# Altium PCB STM32_project_PCB.PcbDoc
Units mm, origin at the board's own origin, x right, y up, seen from the top; angles counter-clockwise.
Board outline 32.3 x 28.6 mm, 4 copper layers (L1_SIGNAL, L2_GND, L3_GND, Bottom Layer), stack 1.57 mm thick; 35 components, 27 nets, 166 pads, 101 vias.
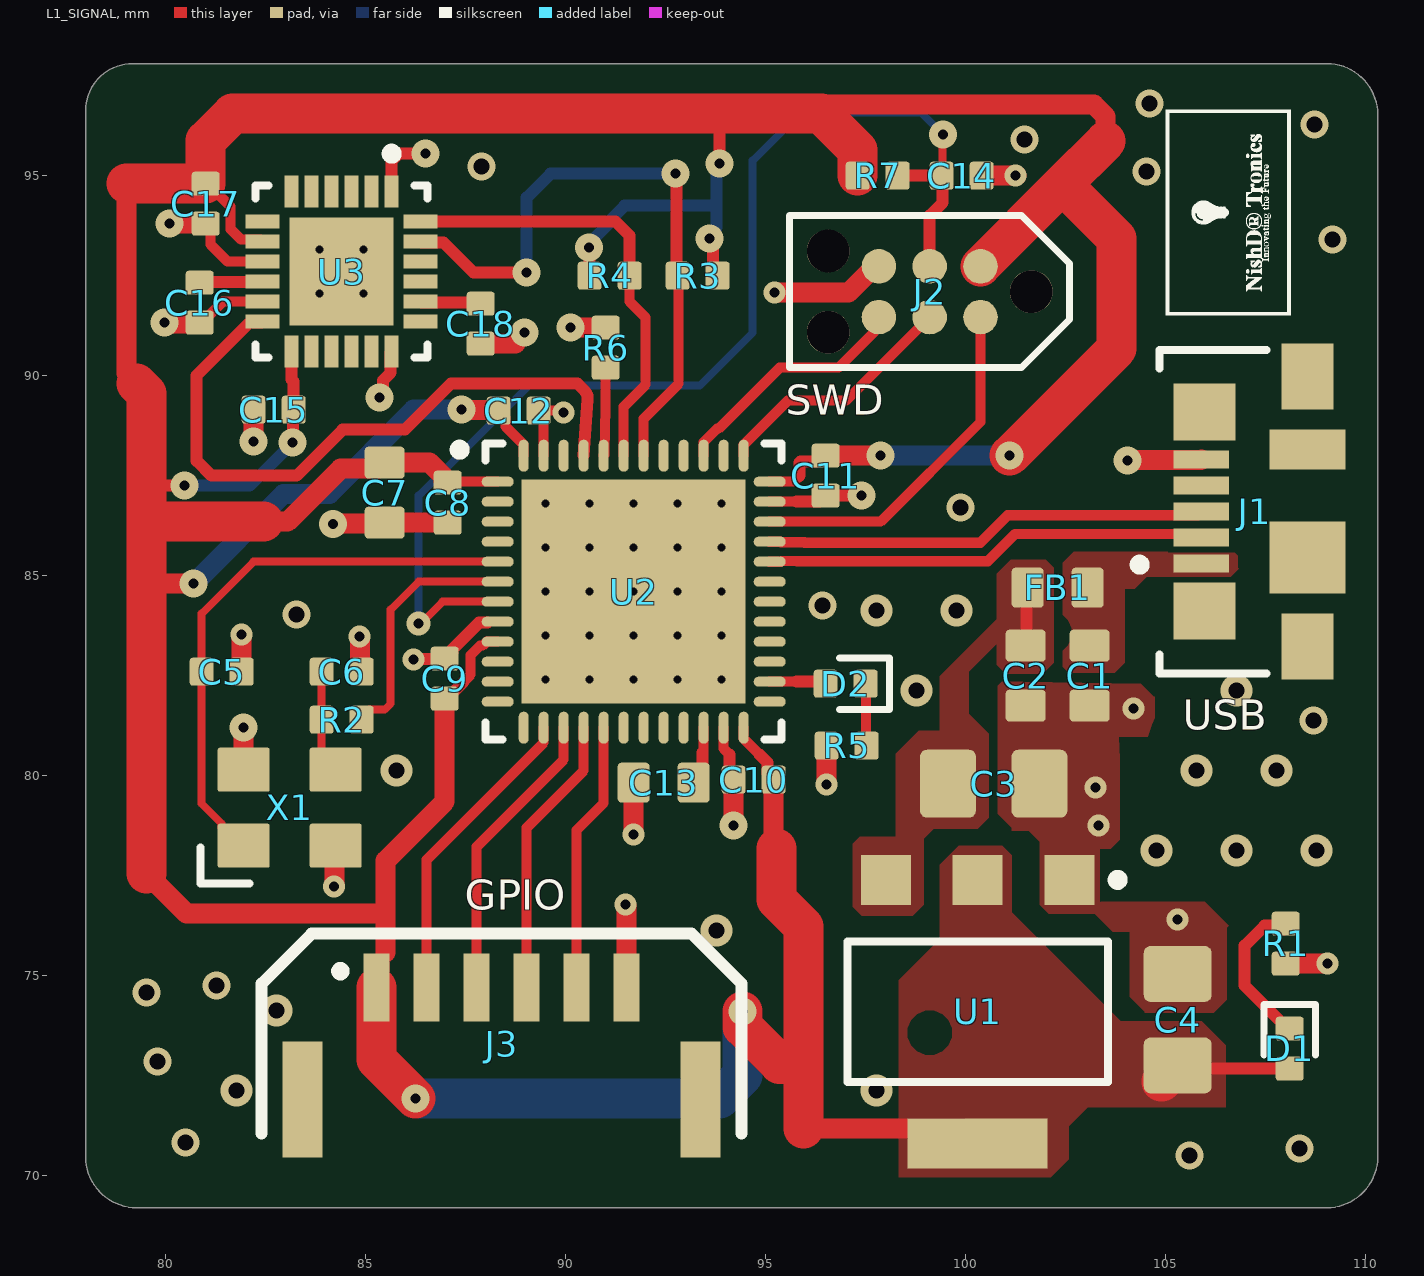
[diagram p0: L1_SIGNAL view]
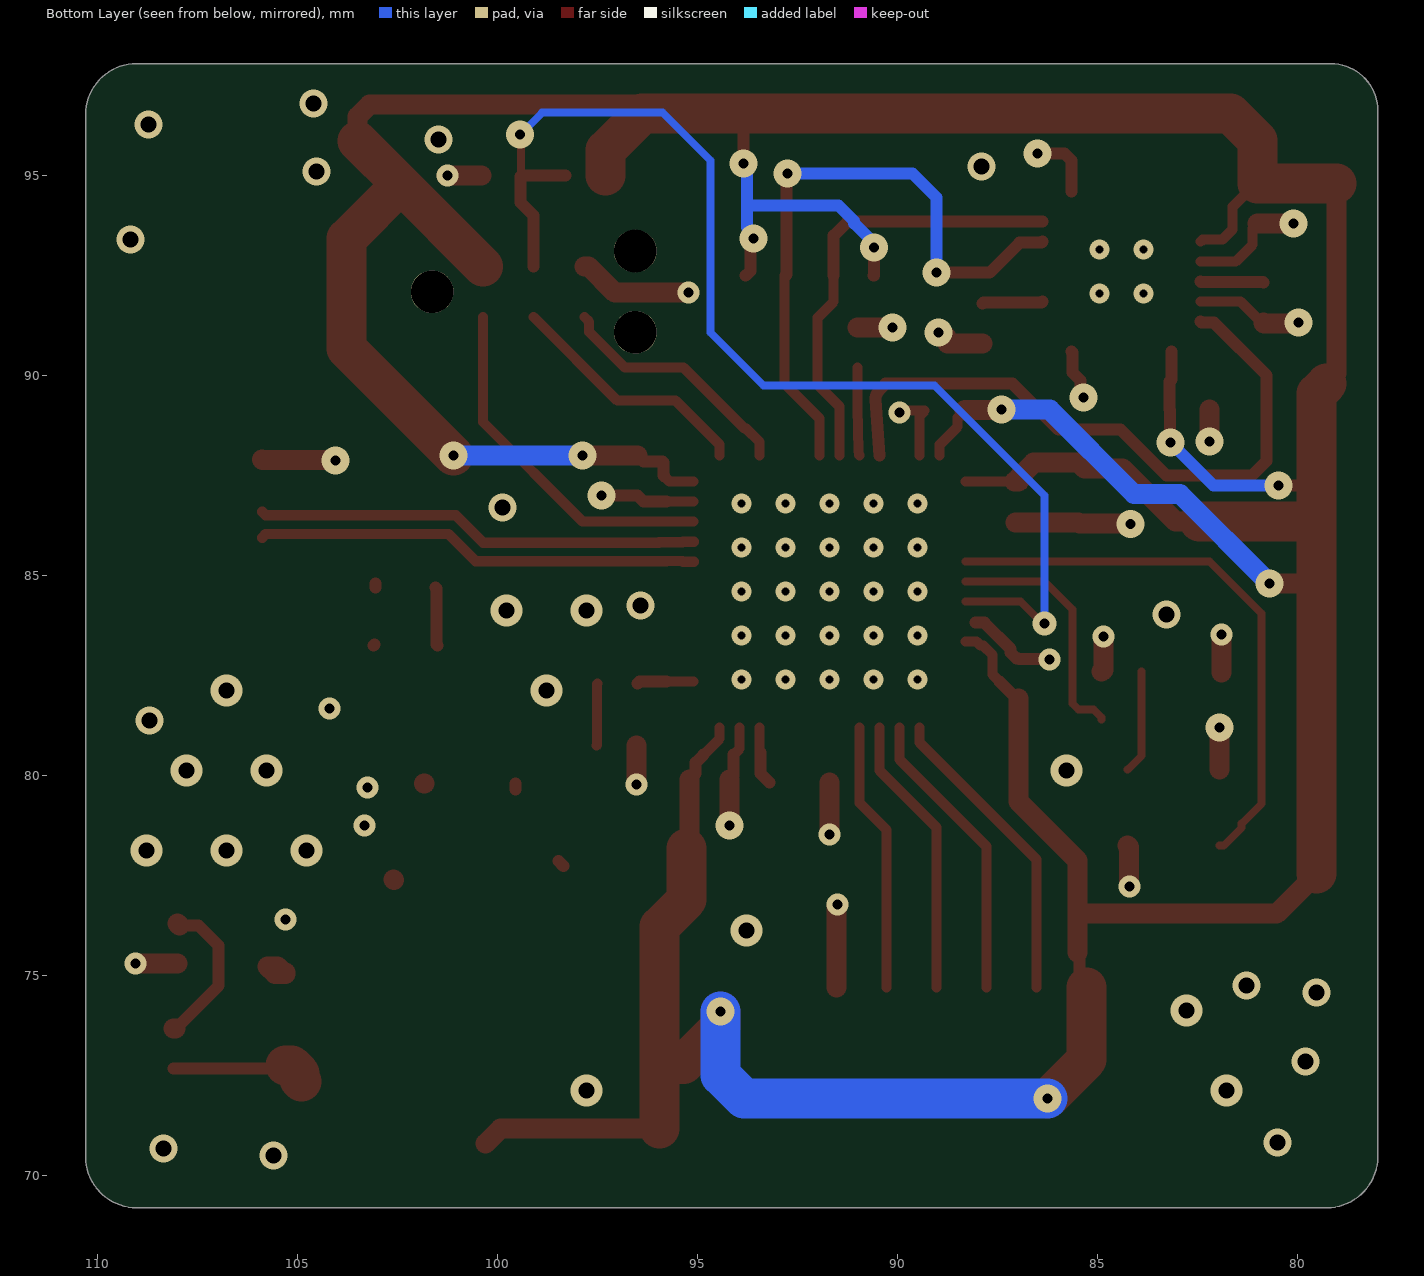
[diagram p1: Bottom Layer view, seen from below]
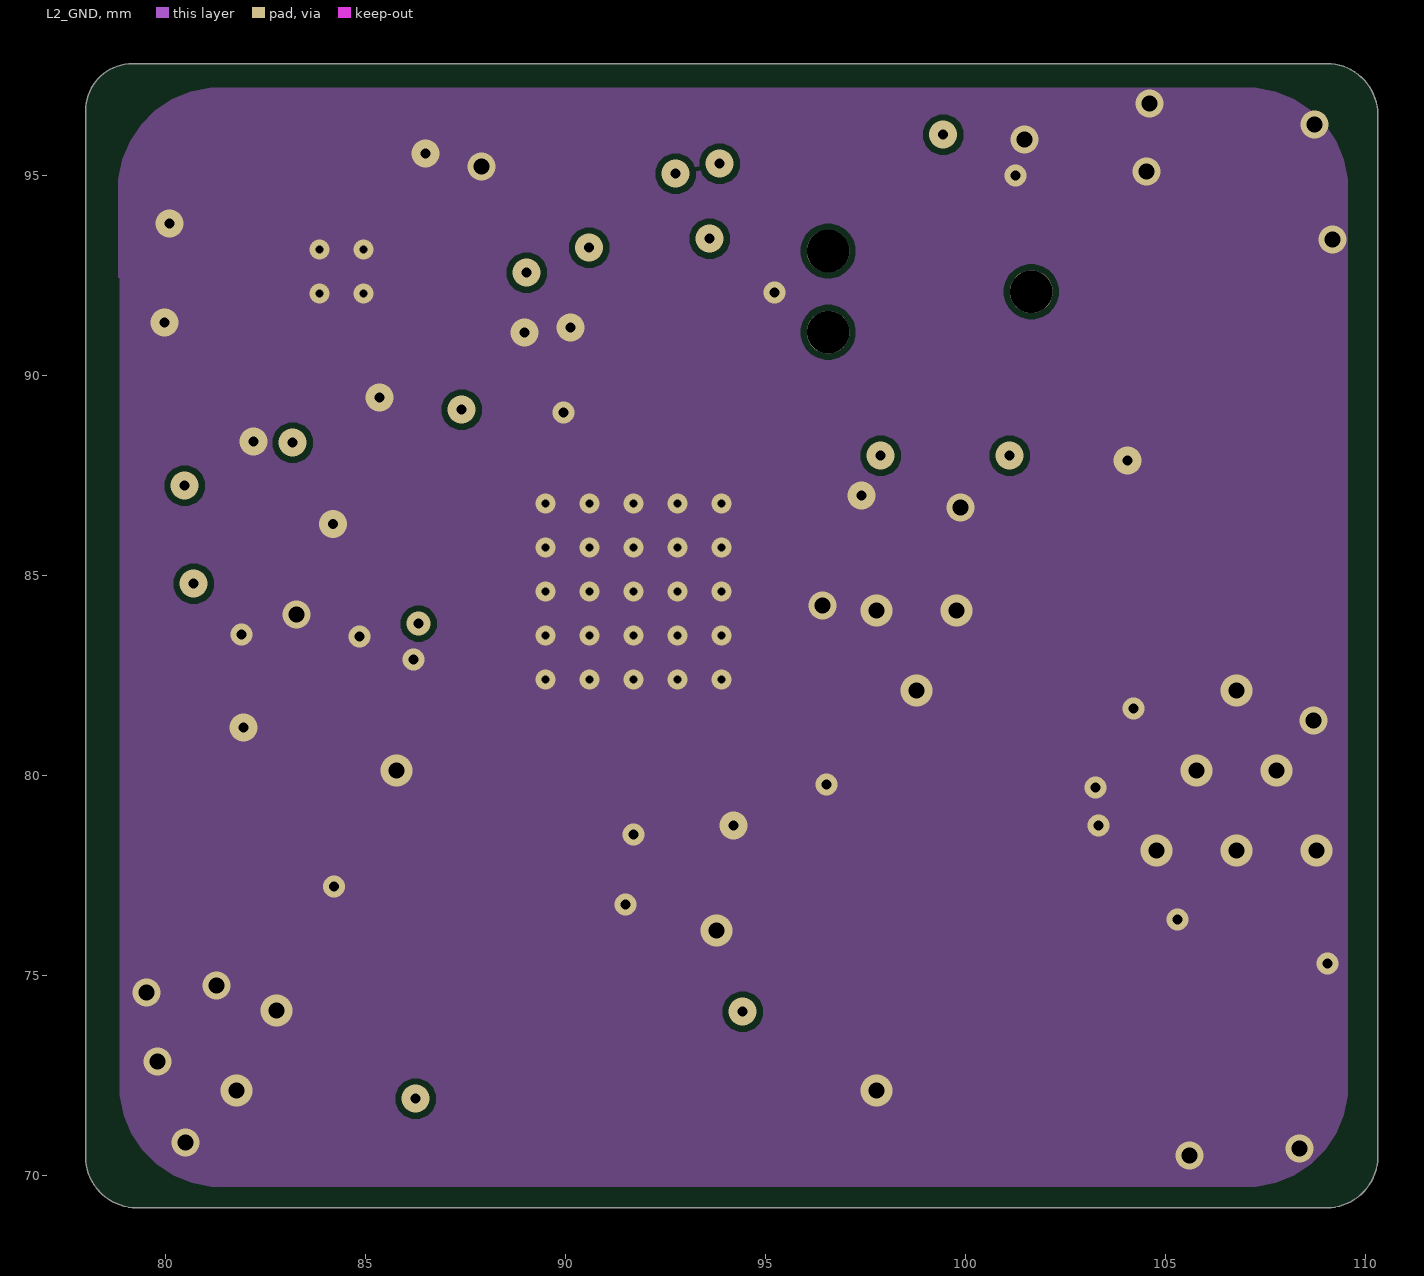
[diagram p2: L2_GND]
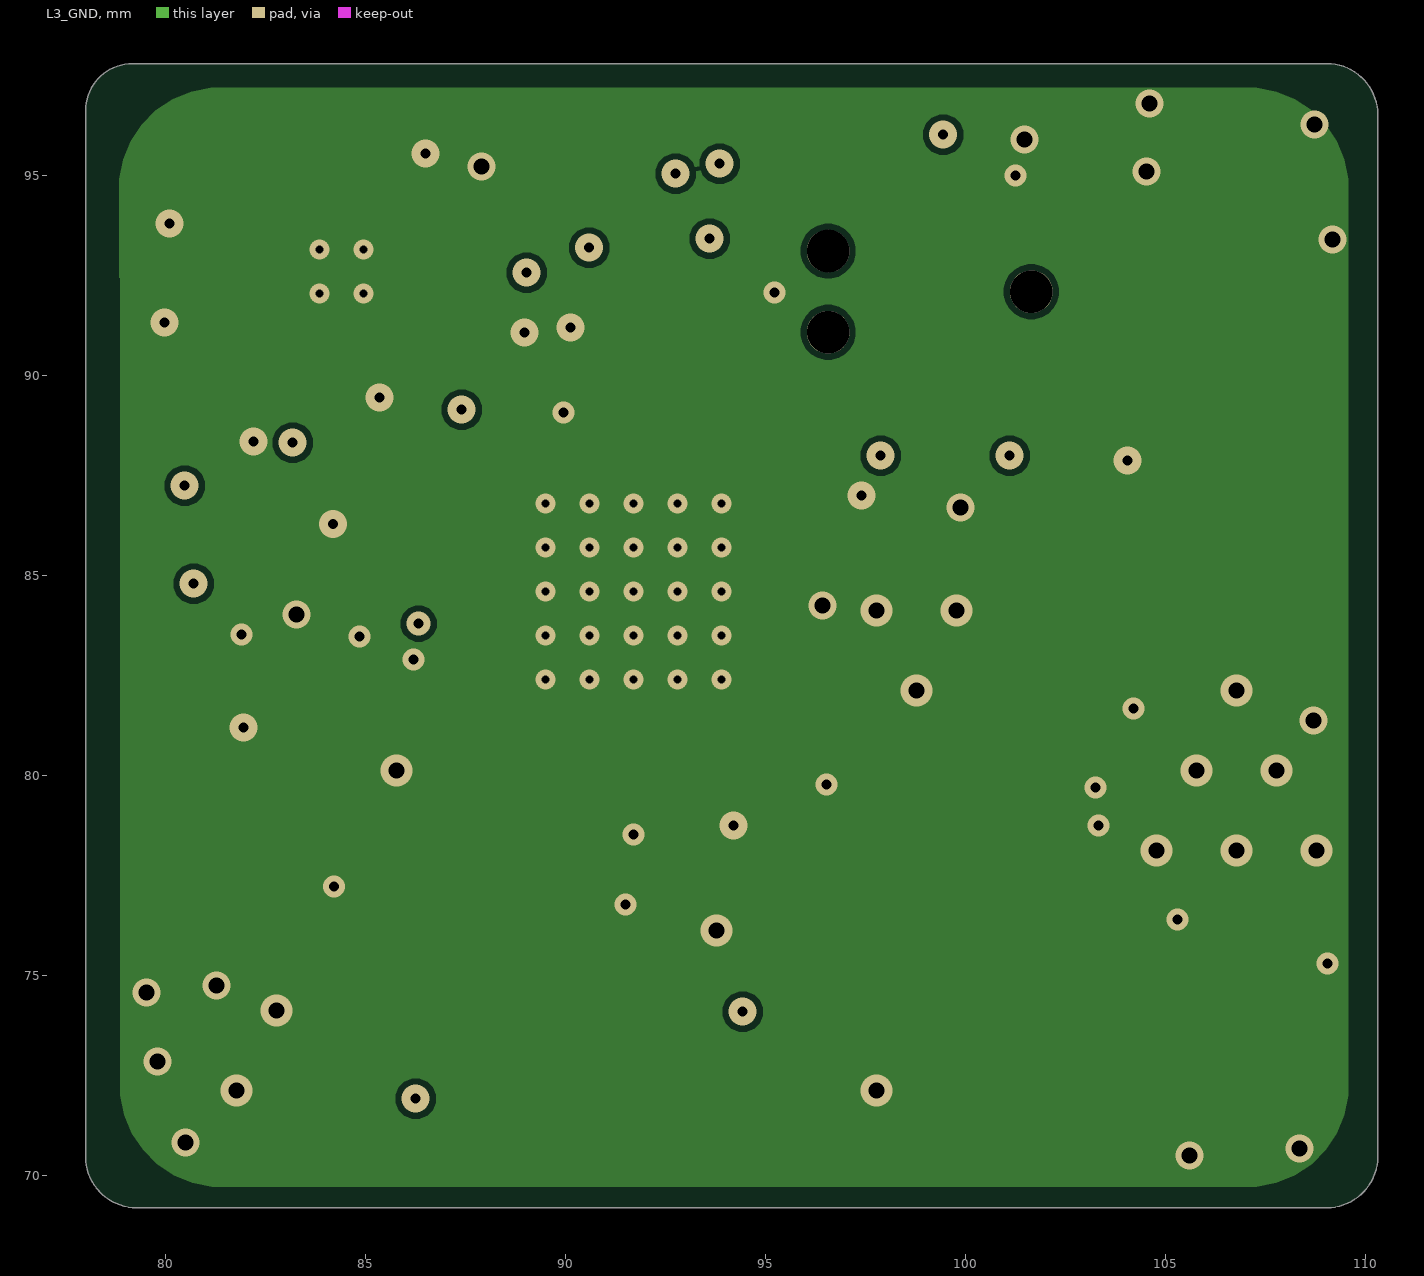
[diagram p3: L3_GND]
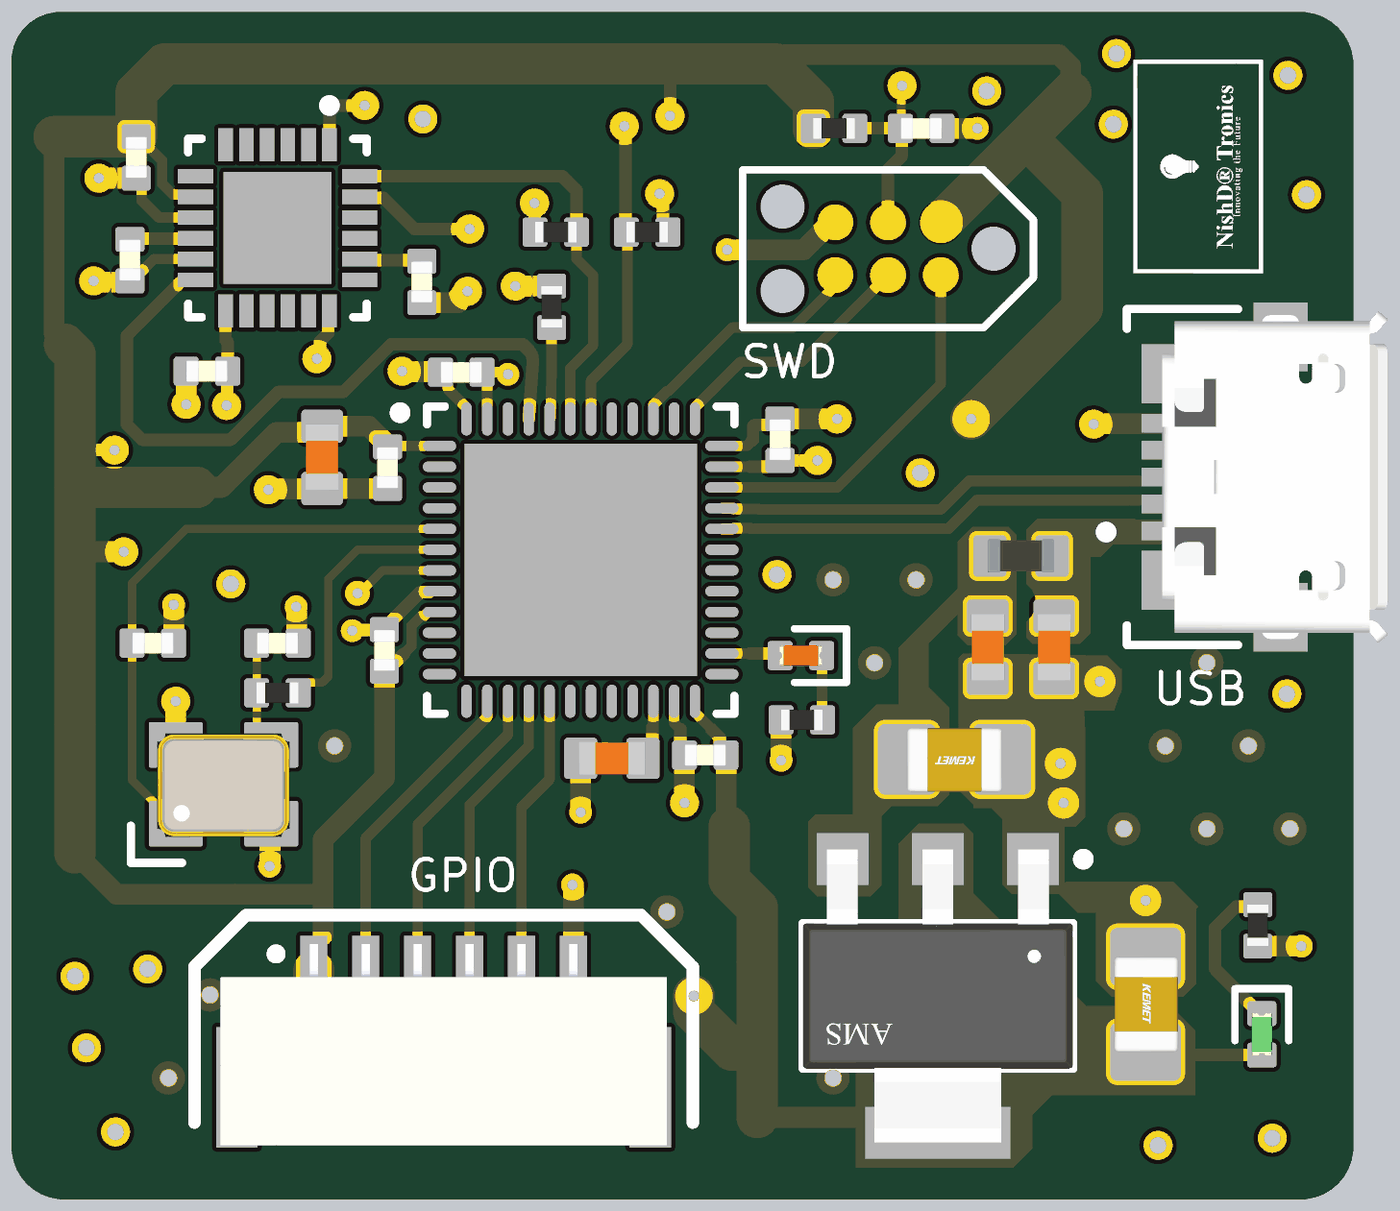
[diagram p4: 3D render of the assembled board from above, using the file's embedded part models]

## Layer stack, top to bottom
Top Solder: solder mask 0.0254, SM-001, Dk 4
L1_SIGNAL: signal copper 0.035
Dielectric 1: prepreg 0.2, PP-017, Dk 4.6
L2_GND: signal copper 0.0175
Dielectric 3: core 1.065, Core-039, Dk 4.6
L3_GND: signal copper 0.0175
Dielectric 5: prepreg 0.2, PP-017, Dk 4.6
Bottom Layer: signal copper 0.035
Bottom Solder: solder mask 0.0254, SM-001, Dk 4

## Board outline
78,70.47 78,96.63 cw(c79.17,96.63) 79.17,97.8 109.03,97.8 cw(c109.03,96.53) 110.3,96.53 110.3,70.47 cw(c109.03,70.47) 109.03,69.2 79.27,69.2 cw(c79.27,70.47)

## Design rules (kind name [scope] priority, off if disabled: settings)
Clearance [All] p1: gap=0.15 ignorepadtopadclearanceinfootprint=FALSE
DiffPairsRouting [All] p1: maxlimit=0.254 minlimit=0.203 mostfreqgap=0.254 toplayer_maxgap=0.203 toplayer_prefgap=0.203 toplayer_minwidth=0.26 toplayer_maxwidth=0.26 toplayer_prefwidth=0.26 bottomlayer_maxgap=0.203 bottomlayer_prefgap=0.203 bottomlayer_minwidth=0.26 bottomlayer_maxwidth=0.26 bottomlayer_prefwidth=0.26 impedanceprofiledriven=TRUE impedanceprofileid={775765ED-6F73-4EA2-BF4E-DD588CDE4D62} impedanceprofilevalue=90.000000 maxuncoupledlength=12.7
PolygonConnect [All] p1: connectstyle=Direct reliefconductorwidth=0.254 reliefentries=4 polygonreliefangle="90 Angle" airgapwidth=0.254
RoutingVias [All] p1: holewidth=0.3 width=0.7 viastyle="Through Hole" minholewidth=0.25 minwidth=0.55 maxholewidth=0.4 maxwidth=0.9
SolderMaskExpansion [All] p1: expansion=0.102 istentingtop=FALSE
UnRoutedNet [All] p1: checkbadconnections=TRUE
Width [All] p1: maxlimit=1 minlimit=0.2 preferedwidth=0.3 midlayer1_minwidth=0.254 midlayer1_maxwidth=0.254 midlayer1_prefwidth=0.254 midlayer2_minwidth=0.254 midlayer2_maxwidth=0.254 midlayer2_prefwidth=0.254 minimp=50.000000 maximp=50.000000 favimp=50.000000
28 further rules are at their usual default settings.

## Classes and differential pairs
differential pair class DIFF_USB: USB_D
differential pair USB_D: +USB_D_P -USB_D_N

## Components (designator, comment, footprint, x,y, rotation, side; value= is the part's Value field where it differs from the comment)
C1 "2u2" CAP_0603 103.1,82.5 r90 top
C2 "2u2" CAP_0603 101.5,82.5 r90 top
C3 "22u" CAP_0805 100.7,79.8 r180 top
C4 "22u" CAP_0805 105.3,73.9 r270 top
C5 "10P" CAP_0402 81.4,82.6 r0 top
C6 "10P" CAP_0402 84.4,82.6 r0 top
C7 "2u2" CAP_0603 85.475,87.075 r90 top
C8 "100n" CAP_0402 87.05,86.825 r90 top
C9 "100n" CAP_0402 86.975,82.425 r270 top
C10 "100n" CAP_0402 94.7,79.9 r0 top
C11 "100n" CAP_0402 96.5,87.5 r90 top
C12 "100n" CAP_0402 88.825,89.125 r180 top
C13 "2u2" CAP_0603 92.45,79.825 r0 top
C14 "100n" CAP_0402 99.9,95 r180 top
C15 "100n" CAP_0402 82.7,89.15 r0 top
C16 "100n" CAP_0402 80.85,91.825 r90 top
C17 "10n" CAP_0402 81,94.3 r90 top
C18 "2n2" CAP_0402 87.875,91.3 r90 top
D1 "GREEN" LED_0402_GREEN 108.1,73.175 r90 top
D2 "RED" LED_0402_RED 97,82.3 r0 top
FB1 "120R" FB_0603 102.3,84.7 r180 top
J1 "473460001" FP-473460001-MFG 108.2,86.6 r90 top
J2 "TC2030-NL" TC2030-NL-FP 99.1,92.1 r180 top
J3 "SM06B-GHS-TB" SM06B-GHS-TB 88.4,73.3 r0 top
R1 "1k" RES_0402 108,75.8 r270 top
R2 "0R" RES_0402 84.4,81.4 r0 top
R3 "2k2" RES_0402 93.3,92.5 r0 top
R4 "2k2" RES_0402 91.1,92.5 r180 top
R5 "1k" RES_0402 97.025,80.75 r180 top
R6 "10k" RES_0402 91,90.7 r270 top
R7 "10k" RES_0402 97.8,95 r180 top
U1 "AMS1117-3.3" FP-AMS1117-IPC_C 100.3,74.1 r270 top
U2 "STM32F411CEU6" STM-UFQFPN48_L 91.7,84.6 r0 top
U3 "MPU-6050" IS-QFN-24_V 84.4,92.6 r270 top
X1 "24MHz" XTAL_3225 83.1,79.2 r0 top

## Footprints (in the part's own frame and the unit in brackets; to place one, negate y for a bottom-side part, rotate by r counter-clockwise, add the part's x,y. Pads: shape width x height; smd on the part's side, far side on the other; paste and mask are expansions set on the pad)
CAP_0402 [mm]
  rrect25% 0.6x0.7 smd: 1(-0.5,0) 2(0.5,0)
  body extent -0.5,-0.26 0.5,0.26, height 0.37
CAP_0603 [mm]
  rrect25% 0.8x1 smd: 1(-0.75,0) 2(0.75,0)
  body extent -0.8,-0.4 0.8,0.4, height 0.51
CAP_0805 [mm]
  rrect25% 1.4x1.7 smd: 1(-1.143,0) 2(1.143,0)
  body extent -1.15,-0.76 1.15,0.79, height 1.01
FB_0603 [mm]
  rrect25% 0.8x1 smd: 1(-0.75,0) 2(0.75,0)
  body extent -0.8,-0.4 0.8,0.4, height 0.81
FP-473460001-MFG [mm]
  rect 0.45x1.38 smd paste+0 mask+0: 1(-1.3,2.31) 2(-0.65,2.31) 3(0,2.31) 4(0.65,2.31) 5(1.3,2.31)
  rect 1.425x1.55 smd paste+0 mask+0: 6(-2.488,2.225) 7(2.488,2.225)
  rect 1.65x1.3 smd paste+0 mask+0: 8(-3.375,-0.35) 11(3.375,-0.35)
  rect 1.8x1.9 smd paste+0 mask+0: 9(-1.15,-0.35)
  rect 1x1.9 smd paste+0 mask+0: 10(1.55,-0.35)
  silkscreen extent -4.05,0.67 4.05,3.97, body extent -4.3,-2.48 4.3,3.45, height 0.25
FP-AMS1117-IPC_C [mm]
  rect 1.25x1.25 smd paste+0 mask+0: 1(-3.295,2.29) 2(-3.295,0) 3(-3.295,-2.29)
  rect 1.25x3.5 smd paste+0 mask+0: 4(3.295,0)
  silkscreen extent -3.42,-3.25 1.75,3.63, body extent -3.9,-3.35 3.9,3.35, height 0.25
IS-QFN-24_V [mm] "QFN, 24-Leads, Body 4x4mm, Pitch 0.5mm, Thermal Pad 2.7x2.6mm"
  rect 0.8x0.35 smd: 1(-2,1.25) 2(-2,0.75) 3(-2,0.25) 4(-2,-0.25) 5(-2,-0.75) 6(-2,-1.25) 13(2,-1.25) 14(2,-0.75) 15(2,-0.25) 16(2,0.25) 17(2,0.75) 18(2,1.25)
  rect 0.35x0.85 smd mask+0.102: 7(-1.25,-1.975) 8(-0.75,-1.975) 9(-0.25,-1.975) 10(0.25,-1.975) 11(0.75,-1.975) 12(1.25,-1.975) 19(1.25,1.975) 20(0.75,1.975) 21(0.25,1.975) 22(-0.25,1.975) 23(-0.75,1.975) 24(-1.25,1.975)
  rect 2.7x2.6 smd: 25(0,0)
  silkscreen extent -3.07,-2.15 2.15,2.15, body extent -2,-2 2,2, height 0.95
LED_0402_GREEN [mm]
  rrect25% 0.6x0.7 smd: A(-0.5,0) K(0.5,0)
  silkscreen extent -0.15,-0.65 1.1,0.65, body extent -0.51,-0.25 0.51,0.25, height 0.45
LED_0402_RED [mm]
  rrect25% 0.6x0.7 smd: A(-0.5,0) K(0.5,0)
  silkscreen extent -0.15,-0.65 1.1,0.65, body extent -0.51,-0.25 0.51,0.25, height 0.45
RES_0402 [mm]
  rrect25% 0.6x0.7 smd: 1(-0.5,0) 2(0.5,0)
  body extent -0.5,-0.25 0.5,0.25, height 0.3
SM06B-GHS-TB [mm]
  rect 0.65x1.7 smd: 1(-3.125,1.4) 2(-1.875,1.4) 3(-0.625,1.4) 4(0.625,1.4) 5(1.875,1.4) 6(3.125,1.4)
  rect 1x2.9 smd: ""(-4.975,-1.4) ""(4.975,-1.4)
  silkscreen extent -6,-2.25 6,2.75, body extent -5.38,-2.8 5.38,2.05, height 4.26
STM-UFQFPN48_L [mm] "QFN, 48-Leads, Body 7.1x7.1mm, Pitch 0.5mm, Thermal Pad 5.6x5.6mm, IPC High Density"
  oval 0.8x0.25 smd: 1(-3.4,2.75) 2(-3.4,2.25) 3(-3.4,1.75) 4(-3.4,1.25) 5(-3.4,0.75) 6(-3.4,0.25) 7(-3.4,-0.25) 8(-3.4,-0.75) 9(-3.4,-1.25) 10(-3.4,-1.75) 11(-3.4,-2.25) 12(-3.4,-2.75) 25(3.4,-2.75) 26(3.4,-2.25) 27(3.4,-1.75) 28(3.4,-1.25) 29(3.4,-0.75) 30(3.4,-0.25) 31(3.4,0.25) 32(3.4,0.75) 33(3.4,1.25) 34(3.4,1.75) 35(3.4,2.25) 36(3.4,2.75)
  oval 0.25x0.8 smd: 13(-2.75,-3.4) 14(-2.25,-3.4) 15(-1.75,-3.4) 16(-1.25,-3.4) 17(-0.75,-3.4) 18(-0.25,-3.4) 19(0.25,-3.4) 20(0.75,-3.4) 21(1.25,-3.4) 22(1.75,-3.4) 23(2.25,-3.4) 24(2.75,-3.4) 37(2.75,3.4) 38(2.25,3.4) 39(1.75,3.4) 40(1.25,3.4) 41(0.75,3.4) 42(0.25,3.4) 43(-0.25,3.4) 44(-0.75,3.4) 45(-1.25,3.4) 46(-1.75,3.4) 47(-2.25,3.4) 48(-2.75,3.4)
  rect 5.6x5.6 smd: 49(0,0)
  silkscreen extent -4.47,-3.7 3.7,3.7, body extent -3.55,-3.55 3.55,3.55, height 0.6
TC2030-NL-FP [mil]
  round 33.98 smd paste-16.99: 1(-50,-25) 2(-50,25) 3(0,-25) 4(0,25) 5(50,-25) 6(50,25)
  round 42.01 hole 42.01 unplated: MH(-100,0) MH(100,-40) MH(100,40)
  silkscreen extent -138,-75 138,75
XTAL_3225 [mm]
  rrect10% 1.3x1.1 smd: 1(-1.15,-0.95) 2(1.15,-0.95) 3(1.15,0.95) 4(-1.15,0.95)
  silkscreen extent -2.23,-1.89 -1,-1, body extent -1.6,-1.28 1.6,1.22, height 0.61

## Part data
C1 C2 C7 C13: library part CAP_0603, "Capacitor SMD 0603"
C3 C4: library part CAP_0805, "Capacitor SMD 0805"
C5 C6 C8 C9 C10 C11 C12 C14 C15 C16 C17 C18: library part CAP_0402, "Capacitor SMD 0402"
D1: library part LED_0402_GREEN, "LED 0402 GREEN SMD"
D2: library part LED_0402_RED, "LED 0402 RED SMD"
FB1: library part FB_0603, "Ferrite Bead SMD 0603"
J1: library part CMP-2000-05246-2, "CONN RCPT USB2.0 MICRO B SMD R/A", Current Rating=1.8A, Manufacturer=Molex, Package=0, Temperature="-30°C to +85°C", Temperature Range High=+85°C, Temperature Range Low=-30°C, Voltage Rating=30V, Automotive=No, Category=Conn, ComponentLink2Description=Datasheet, ComponentLink2URL=https://www.molex.com/webdocs/datasheets/pdf/en-us/0473460001_IO_CONNECTORS.pdf, Conn Orientation="Right Angle", Contact Material=Gold,Nickel, Device Class L1=Connectors, Device Class L2="USB Connectors", Device Class L3=unset, Digikey Description="CONN RCPT USB2.0 MICRO B SMD R/A", Footprint Url=https://www.molex.com/pdm_docs/sd/473460001_sd.pdf, Height=2.945mm, Is Female=yes, Lead Free=Yes, Manufacturer Part Number=473460001, Number Of Contacts=5, Octopart=https://octopart.com/47346-0001-molex-7164928, Pitch=0.65mm, RoHS=TRUE, Shielding=true, Usb Standard="USB 2.0"
J2: "Tag-Connect No-Solder SWD Debug Connector (No Legs) DO NOT PLACE", Manufacturer=Tag-Connect, Manufacturer Part Number=TC2030-NL-FP
J3: "Header Connector 6 Position 1.25MM Pitch SMD Horizontal JST GH", Manufacturer=JST, Manufacturer Part Number=SM06B-GHS-TB
R1 R2 R3 R4 R5 R6 R7: library part RES_0402, "Resistor SMD 0402"
U1: library part CMP-209535-000001-1, "LDO Voltage Regulators 1A, 3.3V", Dropout Voltage=1.1V, Manufacturer="Advanced Monolithic Systems", Max Junction Temp=+125°C, Max Power Dissipation=1.2W, Max Supply Voltage=15V, Nominal Supply Current=5mA, Output Current=1A, Output Voltage=3.3V, Package=AMS1117, Temperature="-40°C to +125°C", Temperature Range Low=-40°C, Automotive=No, Category=IC, ComponentLink2Description=Datasheet, ComponentLink2URL=http://www.advanced-monolithic.com/pdf/ds1117.pdf, Device Class L1="Integrated Circuits (ICs)", Device Class L2="Power Management ICs", Device Class L3="Voltage Regulators - Linear", Height=1.8mm, Ipc Land Pattern Name=SOT229P700X180-4, Lead Free=Yes, Manufacturer Part Number=AMS1117-3.3, Number Of Outputs=1, Octopart=https://octopart.com/ams1117-3.3-advanced+monolithic+systems-25899300, Output Type=Fixed, RoHS=TRUE, Standoff Height=0.64mm, Temperature Range High=+125°C
U2: library part CMP-0243-00165-1, "ARM Cortex-M4 32-bit MCU+FPU, 512 KB Flash, 128 KB RAM, 36 I/Os, 48-Pin UFQFPN, -40 to 85 degC, Tray", I/Os (High Current)=36, Operating Frequency(F) (Processor speed) (MHz)=100, Package Description=UFQFPN48, Package Reference="48-Pin Ultra Thin Fine Pitch Quad Flat No-Lead, 7 x 7 x 0.6 mm Body, 0.5 mm Pitch, Exposed Pad", Supply Voltage(Vcc) min (V)=1.7, ComponentLink1Description="Manufacturer URL", ComponentLink1URL=http://www.st.com/, ComponentLink2Description=Datasheet, ComponentLink2URL=http://www.st.com/st-web-ui/static/active/en/resource/technical/document/datasheet/DM00115249.pdf, Core="ARM Cortex-M4", DatasheetVersion="Rev. 6", FLASH Size (Prog) (kB)=512, Internal RAM Size (kB)=128, Mounting Technology="Surface Mount", Packing=Tray
U3: library part CMP-1753-00002-2, "3-Axis Gyroscope, Accelerometer and a Digital Motion Processor(TM) (DMP), 2.375 to 3.46 V, -40 to 85 degC, 24-Pin QFN, RoHS, Tape and Reel", Manufacturer=InvenSense, Standard Package=5,000, Category=Sensors,Transducers, Datasheet URL=http://datasheet.octopart.com/MPU-6050-InvenSense-datasheet-14421344.pdf, Datasheet Version="Rev. 3.3, 05/2012", Dynamic Catalog=MPU-6000™Series, Family=Multifunction, Featured Product=MPU-60506-Axis,IntegratedI²CSolution, Manufacturer URL=http://www.invensense.com/, Online Catalog=MPU-6000™Series, Other Names="1428-1007-2 / MPU6050", Output Type=Digital, Sensor Type=MotionTracking, Unit PriceUSD=Digital
X1: library part TSX-3225_24.0000MF15X-AC, "Crystal SMD 24MHz 10PPM 7pF 3225", Manufacturer=Epson, Manufacturer Part Number="TSX-3225 24.0000MF15X-AC"

## Via types
v1: diameter 0.5, hole 0.2, L1_SIGNAL to Bottom Layer, 29 vias
v2: diameter 0.7, hole 0.25, L1_SIGNAL to Bottom Layer, 26 vias
v3: diameter 0.7, hole 0.4, L1_SIGNAL to Bottom Layer, 16 vias
v4: diameter 0.55, hole 0.25, L1_SIGNAL to Bottom Layer, 15 vias
v5: diameter 0.8, hole 0.4, L1_SIGNAL to Bottom Layer, tented both sides, 14 vias
v6: diameter 0.6, hole 0.25, L1_SIGNAL to Bottom Layer, 1 vias

## Nets (pads, with @x,y where several pads share a name; then routed paths per layer and width w, separated by ;. In a path a pad name is that pad's centre, name@x,y a point inside that pad or via, vN(x,y) a via of type N, cw(c..) or ccw(c..) an arc to the next point about the centre after c; other vN are vias at no path point)
+3V3: C4.2 C7.2 C8.2 C9.2 C10.2 C11.2 C12.2 C15.2 C17.2 D1.A J2.1 J3.1 R3.2 R4.2 R7.2 U1.2 U1.4 U2.1 U2.9 U2.24 U2.36 U2.48 U3.8 U3.13 | length 155.2
  L1_SIGNAL w0.25: C17.2 81.05,94.8 81.625,94.225 81.625,93.661 81.886,93.4 82.375,93.4 U3.8 ; C8.2@87.075,87.35 U2.1 ; 87.45,82.35 87.625,82.525 87.625,83.016 87.859,83.25 87.925,83.25 88.025,83.35 U2.9 ; C12.2 88.5,88.95 88.5,88.725 88.95,88.275 U2.48 ; U2.24 94.45,80.925 94.85,80.525 ; U2.36 95.7,87.35 95.825,87.475
  L1_SIGNAL w0.3: 79.525,87.35 79.625,87.25 v2(80.475,87.25) ; U3.13 83.15,89.9 83.2,89.85 C15.2 83.188,89.138 83.188,88.338 v2(83.175,88.325) ; J3.1 85.45,74.875 85.45,75.526 85.5,75.576 ; C9.2@87.025,81.925 87.45,82.35 ; v2(90.587,93.2) 90.594,93.194 90.594,92.506 R4.2 ; v2(93.6,93.425) 93.677,93.348 93.677,92.623 R3.2 ; v2(93.85,95.3) 93.85,96.55 ; 94.85,80.525 95.05,80.325 95.05,80.05 C10.2 ; 95.825,87.475 95.85,87.5 95.85,87.824 95.876,87.85 96.35,87.85 C11.2 ; C4.2 105.382,72.675 D1.A
  L1_SIGNAL w0.5: 79.025,94.8 79.025,90.05 79.275,89.8 ; 79.525,77.55 80.525,76.55 85.5,76.55 ; 79.525,84.875 79.6,84.8 v2(80.7,84.8) ; 82.45,86.35 83.05,86.35 84.375,87.675 85.325,87.675 C7.2 86.6,87.825 86.95,87.475 86.95,87.375 86.975,87.35 C8.2@87.075,87.35 ; 85.5,75.576 85.5,76.55 ; C9.2 86.975,79.35 85.5,77.875 85.5,76.55 ; v2(87.4,89.15) 87.412,89.138 88.312,89.138 C12.2 ; C10.2 95.2,78.25 95.275,78.175 ; 95.95,71.175 99.93,71.175 U1.4 ; 96.389,96.55 96.614,96.775 103.207,96.775 103.5,96.482 103.5,95.865 ; C11.2 97.825,88 v2(97.875,88)
  L1_SIGNAL w1: 79.025,94.8 C17.2 81,95.875 81.675,96.55 93.85,96.55 96.389,96.55 97.3,95.639 R7.2 ; 79.275,89.8 79.525,89.55 79.525,87.35 79.525,86.45 ; 79.525,77.55 79.525,84.875 79.525,86.45 ; 82.45,86.35 79.625,86.35 79.525,86.45 ; J3.1 85.275,72.9 v2(86.25,71.925) ; v2(94.425,74.1) 94.425,73.719 95.35,72.794 95.95,72.794 ; 95.275,78.175 95.275,76.9 95.95,76.225 95.95,72.794 ; 95.95,71.175 95.95,72.794 ; J2.1 102.417,94.783 ; v2(101.1,88) 103.775,90.675 103.775,93.425 102.417,94.783 ; 103.5,95.865 102.417,94.783 ; C4.2@104.9,72.357 104.95,72.407 104.95,72.557 105.15,72.757 C4.2
  Bottom Layer w0.3: v2(80.475,87.25) 82.1,87.25 v2(83.175,88.325) ; v2(90.587,93.2) 90.587,93.308 91.088,93.809 91.088,93.863 91.475,94.25 93.712,94.25 93.773,94.311 ; v2(93.6,93.425) 93.6,93.533 93.773,93.707 93.773,94.311 ; v2(93.85,95.3) 93.773,95.223 93.773,94.311
  Bottom Layer w0.5: v2(80.7,84.8) 82.945,87.045 84.093,87.045 86.198,89.15 v2(87.4,89.15) ; v2(97.875,88) v2(101.1,88)
  Bottom Layer w1: v2(86.25,71.925) 93.839,71.925 94.425,72.511 v2(94.425,74.1)
+5V: C2.2 C3.2 FB1.2 U1.3 | length 1.8
  L1_SIGNAL w0.3: U1.3@98.357,77.743 U1.3@98.485,77.87 ; C3.2@99.557,79.65 C3.2 ; C2.2 101.525,83.275 101.525,84.675 FB1.2
CRISTAL_IN: C6.1 R2.1 X1.3 | length 2.6
  L1_SIGNAL w0.2: C6.1 R2.1 83.9,80.5 X1.3
GND: C1.1 C2.1 C3.1 C4.1 C5.2 C6.2 C7.1 C8.1 C9.1 C10.1 C11.1 C12.1 C13.1 C14.1 C15.1 C16.1 C17.1 C18.1 J1.5 J2.5 J3.6 R1.2 R5.2 R6.1 U1.1 U2.8 U2.23 U2.35 U2.47 U2.49 U3.1 U3.9 U3.11 U3.18 U3.25 X1.2 X1.4 | length 39.8
  L1_SIGNAL w0.25: C16.1 80.9,91.325 81.425,91.85 U3.11 ; C17.1 81.125,93.675 81.125,93.275 81.55,92.85 U3.9 ; U2.47 89.45,89 C12.1 89.9,89.125 cw(c89.9,89.075) v4(89.95,89.075) ; J3.6 J3.6@91.613,74.788 ; C13.1@91.613,79.737 C13.1 ; U2.23 93.95,80.675 94.1,80.525 ; U2.35 95.775,86.85
  L1_SIGNAL w0.3: v2(85.35,89.45) 85.427,89.527 85.427,89.877 85.625,90.076 85.625,90.575 U3.18 ; U3.1 85.65,95.374 85.826,95.55 v2(86.5,95.55) ; v4(86.2,82.9) 86.212,82.912 86.963,82.912 C9.1 87.025,82.925 87.175,83.075 87.175,83.167 87.833,83.825 U2.8@88.05,83.825 ; 94.1,80.525 94.1,80 C10.1 ; 95.775,86.85 96.35,86.85 C11.1 v2(97.4,87)
  L1_SIGNAL w0.5: v2(79.975,91.325) ccw(c80,91.325) 80,91.3 80.825,91.3 ccw(c80.825,91.325) C16.1 ; v2(80.1,93.8) C17.1 ; C5.2 81.9,82.575 v4(81.9,83.525) ; X1.4 v2(81.95,81.2) ; v2(82.2,88.35) C15.1 ; v2(84.18,86.295) 84.195,86.31 85.46,86.31 C7.1 C8.1 ; v4(84.21,77.225) 84.219,77.235 84.219,78.219 X1.2 ; v4(84.85,83.475) 84.86,83.465 84.86,82.64 C6.2 ; C18.1 88.75,90.8 88.75,90.85 cw(c88.975,90.85) v2(88.975,91.075) ; v2(90.125,91.2) R6.1 ; v4(91.5,76.775) 91.525,76.75 J3.6 ; v4(91.7,78.525) C13.1 ; v2(94.2,78.75) C10.1 ; v4(95.225,92.075) 97.072,92.075 97.732,92.735 J2.5 ; v4(96.525,79.775) R5.2 ; C14.1 101.275,95 v4(101.25,95) ; C3.1@101.825,79.8 C3.1 ; U1.1 U1.1@102.6,77.405 ; v2(104.05,87.875) 104.062,87.888 105.877,87.888 J1.5 ; C4.1 105.568,75.043 105.75,75.225 105.5,75.225 105.325,75.05 C4.1@105.3,75.075 ; R1.2 108.025,75.3 v4(109.05,75.3)
  other v1: 89.5,82.4 90.6,82.4 91.7,82.4 92.8,82.4 93.9,82.4 89.5,83.5 90.6,83.5 91.7,83.5 92.8,83.5 93.9,83.5 89.5,84.6 90.6,84.6 91.7,84.6 92.8,84.6 93.9,84.6 89.5,85.7 90.6,85.7 91.7,85.7 92.8,85.7 93.9,85.7 89.5,86.8 90.6,86.8 91.7,86.8 92.8,86.8 93.9,86.8 83.85,92.05 84.95,92.05 83.85,93.15 84.95,93.15
  other v3: 105.6,70.5 108.35,70.675 80.5,70.825 79.8,72.85 79.525,74.575 81.275,74.75 108.7,81.375 83.275,84.025 96.425,84.25 99.875,86.7 109.175,93.4 104.525,95.1 87.9,95.225 101.475,95.9 108.725,96.275 104.6,96.8
  other v4: 105.3,76.4 103.325,78.75 103.25,79.7 104.2,81.675
  other v5: 81.775,72.125 97.775,72.125 82.775,74.125 93.775,76.125 104.775,78.125 106.775,78.125 108.775,78.125 85.775,80.125 105.775,80.125 107.775,80.125 98.775,82.125 106.775,82.125 97.775,84.125 99.775,84.125
IMU_CPOUT: C18.2 U3.20 | length 1.5
  L1_SIGNAL w0.3: U3.20 86.4,91.825 87.85,91.825 C18.2
IMU_INT: U2.45 U3.12 | length 16.9
  L1_SIGNAL w0.3: U3.12 82.4,91.325 82.092,91.325 80.775,90.008 80.775,87.869 81.144,87.5 83.275,87.5 84.425,88.65 85.981,88.65 87.131,89.8 90.3,89.8 90.463,89.637 cw(c90.251,89.425) 90.55,89.404 U2.45
IMU_REGOUT: C16.2 U3.10 | length 1.6
  L1_SIGNAL w0.3: C16.2 80.863,92.338 82.412,92.338 U3.10
IMU_SCL: R3.1 U2.42 U3.23 | length 16.3
  L1_SIGNAL w0.25: U2.42 91.95,88.925 92.825,89.8 92.825,92.475 R3.1
  L1_SIGNAL w0.3: U3.23 86.4,93.325 86.95,93.325 87.7,92.575 v2(89.025,92.575) ; v2(92.75,95.05) 92.775,95.025 92.775,92.525 R3.1
  Bottom Layer w0.3: v2(89.025,92.575) 89.025,94.45 89.625,95.05 v2(92.75,95.05)
IMU_SDL: R4.1 U2.43 U3.24 | length 11.3
  L1_SIGNAL w0.25: U2.43 91.45,89.225 92,89.775 92,91.45 91.6,91.85 R4.1
  L1_SIGNAL w0.3: U3.24 91.25,93.85 91.6,93.5 R4.1
LED_PWR_K: D1.K R1.1 | length 3.8
  L1_SIGNAL w0.3: R1.1@107.95,76.25 107.475,76.25 106.975,75.75 106.975,74.75 D1.K@108.05,73.675
  L1_SIGNAL w0.5: R1.1@107.95,76.25 R1.1 ; D1.K@108.05,73.675 D1.K
MCU_BOOT0: R6.2 U2.44 | length 2.2
  L1_SIGNAL w0.25: U2.44 90.95,88.021 90.972,88.021 90.974,88.102 91,89.203 R6.2
MCU_LED_A: D2.A U2.26 | length 1.4
  L1_SIGNAL w0.25: U2.26 95.775,82.35
  L1_SIGNAL w0.3: 95.775,82.35 96.45,82.35 D2.A
MCU_LED_K: D2.K R5.1 | length 1.6
  L1_SIGNAL w0.25: D2.K 97.512,82.288 97.512,80.763 R5.1
MCU_NRST: C14.2 J2.3 R7.1 U2.7 | length 29.8
  L1_SIGNAL w0.2: v6(86.325,83.8) 86.375,83.8 86.925,84.35 U2.7 ; C14.2 99.419,95.019 99.419,96.006 v2(99.437,96.025)
  L1_SIGNAL w0.3: R7.1 C14.2 99.425,94.975 99.425,94.325 99.1,94 J2.3
  Bottom Layer w0.2: v6(86.325,83.8) 86.325,87 89.075,89.75 93.35,89.75 94.675,91.075 94.675,95.375 95.875,96.575 98.887,96.575 v2(99.437,96.025)
MCU_OSC_IN: C5.1 U2.5 X1.1 | length 14.2
  L1_SIGNAL w0.2: X1.1 81.85,78.25 81.4,78.7 81.4,78.8 80.9,79.3 C5.1 80.9,84.05 82.2,85.35 U2.5
MCU_OSC_OUT: R2.2 U2.6 | length 6.2
  L1_SIGNAL w0.2: R2.2 84.9,81.45 85.1,81.65 85.475,81.65 85.625,81.8 85.625,84.15 86.325,84.85 U2.6
MCU_PA4: J3.2 U2.14 | length 7.7
  L1_SIGNAL w0.25: J3.2 86.525,77.9 88.875,80.25 89.45,80.825 U2.14
MCU_PA5: J3.3 U2.15 | length 7.4
  L1_SIGNAL w0.25: J3.3 87.775,78.225 89.95,80.4 U2.15
MCU_PA6: J3.4 U2.16 | length 7.1
  L1_SIGNAL w0.25: J3.4 89.025,78.7 90.45,80.125 U2.16
MCU_PA7: J3.5 U2.17 | length 6.8
  L1_SIGNAL w0.25: J3.5 90.275,78.645 90.95,79.32 U2.17
MCU_SWCLK: J2.4 U2.37 | length 6.2
  L1_SIGNAL w0.25: U2.37 94.45,88.275 95.55,89.375 97.01,89.375 J2.4
MCU_SWDIO: J2.2 U2.34 | length 8.9
  L1_SIGNAL w0.25: U2.34 97.875,86.35 100.37,88.845 J2.2
MCU_SWO: J2.6 U2.39 | length 6.2
  L1_SIGNAL w0.25: U2.39 93.45,88.341 93.784,88.675 93.825,88.675 95.35,90.2 96.819,90.2 97.713,91.093 97.713,91.348 J2.6
MCU_VCAP1: C13.2 U2.22 | length 1.5
  L1_SIGNAL w0.25: 93.425,80.575 93.45,80.6 U2.22
  L1_SIGNAL w0.3: C13.2 93.425,80.05 93.425,80.575
USB_D_N: J1.2 U2.32 | length 11.1
  L1_SIGNAL w0.26: U2.32 95.365,85.35 95.383,85.368 95.774,85.368 95.786,85.357 100.551,85.357 101.238,86.043 105.797,86.043 J1.2
USB_D_P: J1.3 U2.33 | length 11.1
  L1_SIGNAL w0.26: U2.33 95.365,85.85 95.383,85.832 95.966,85.832 95.978,85.82 100.359,85.82 101.046,86.507 105.797,86.507 J1.3
VBUS: C1.2 FB1.1 J1.1 | length 0.1
  L1_SIGNAL w0.3: FB1.1 FB1.1@103.05,84.8 ; C1.2@103.075,83.275 C1.2
pads on no net: J1.4 J1.6 J1.7 J1.8 J1.9 J1.10 J1.11 J2.MH J3. U2.2 U2.3 U2.4 U2.10 U2.11 U2.12 U2.13 U2.18 U2.19 U2.20 U2.21 U2.25 U2.27 U2.28 U2.29 U2.30 U2.31 U2.38 U2.40 U2.41 U2.46 U3.2 U3.3 U3.4 U3.5 U3.6 U3.7 U3.14 U3.15 U3.16 U3.17 U3.19 U3.21 U3.22

## Polygon pours and split planes (outlines as drawn)
GND on L1_SIGNAL "GND_L01_P013" (solid, pour order 13): 103.35,76.825 103.375,76.85 105.975,76.85 106.575,76.25 106.525,76.2 106.525,74.4 106.2,74.075 104.475,74.075 104.475,74.1 104.1,74.475 104.1,76.1 103.675,76.1 103.225,76.55 102.075,76.55 101.85,76.775 101.85,78.35 101.575,78.625 101.15,78.625 101.15,78.7 100.8,79.05 100.8,82.25 100.9,82.35 101.425,82.35 104.375,82.3 104.7,81.975 104.725,81.975 104.725,81.45 104.65,81.275 104.55,80.975 103.825,80.975 103.85,80.425 103.85,78.4 103.625,78.175 103.35,78.175
+5V on L1_SIGNAL "+5V_L01_P012" (solid, pour order 12): 100.775,83.912 99.35,82.487 99.35,81.125 98.825,81.125 98.25,80.55 98.25,78.475 97.35,78.475 97.175,78.3 97.175,76.725 97.4,76.5 98.675,76.5 98.95,76.775 98.95,78.425 99.2,78.675 100.3,78.675 100.575,78.95 100.575,81.05 100.075,81.55 100.075,82.6 100.775,83.3 100.775,82.775 101,82.55 101.925,82.55 102.2,82.825 102.2,85.2 102,85.4 101.125,85.4 100.775,85.05
VBUS on L1_SIGNAL "VBUS_L01_P011" (solid, pour order 11): 105.8,85.625 105.775,85.6 102.7,85.6 102.425,85.325 102.425,82.725 102.575,82.575 103.725,82.575 103.975,82.825 103.975,84.675 104.225,84.675 104.525,84.975 106.625,84.975 106.825,85.175 106.8,85.2 106.8,85.5 106.675,85.625
+3V3 on L1_SIGNAL "+3V3" (solid, pour order 4): 98.325,70.662 98.325,69.962 102.125,69.962 102.575,70.412 102.575,71.237 103.05,71.712 106.5,71.712 106.5,73.262 105.9,73.862 103.875,73.862 101.15,76.587 101.15,78.012 100.912,78.25 99.825,78.25 99.35,77.775 99.35,75.912 98.325,74.887 98.325,70.637
GND on L2_GND "GND" (solid, pour order 7): 78.85,92.45 78.85,72.265 ccw(c81.39,72.265) 81.39,69.725 107.01,69.725 ccw(c107.01,72.265) 109.55,72.265 109.55,94.66 ccw(c107.01,94.66) 107.01,97.2 81.359,97.2 ccw(c81.359,94.66) 78.819,94.66 78.819,91.936
GND on L3_GND "GND" (solid, pour order 8): 78.866,92.45 78.866,72.265 ccw(c81.406,72.265) 81.406,69.725 107.026,69.725 ccw(c107.026,72.265) 109.566,72.265 109.566,94.66 ccw(c107.026,94.66) 107.026,97.2 81.375,97.2 ccw(c81.375,94.66) 78.835,94.66 78.835,91.936

## Silkscreen, mask and mechanical layers (free items; w line width, h text height)
Top Overlay:
  drawing of 41 lines, arcs and shapes, not listed
  text "SWD" at 95.5,89.025 h0.75
  text "USB" at 105.425,81.15 h0.75
  text "GPIO" at 87.475,76.65 h0.75
Mechanical 1:
  the board outline again, w0.254

## Text inside footprints (layer, text, board x,y; h text height)
D1: Mechanical 13 "+" at 107.592,71.292 h0.5 r90
D2: Mechanical 13 "+" at 95.117,82.808 h0.5